# EAGLE board connector_board (EAGLE 9.5.2)
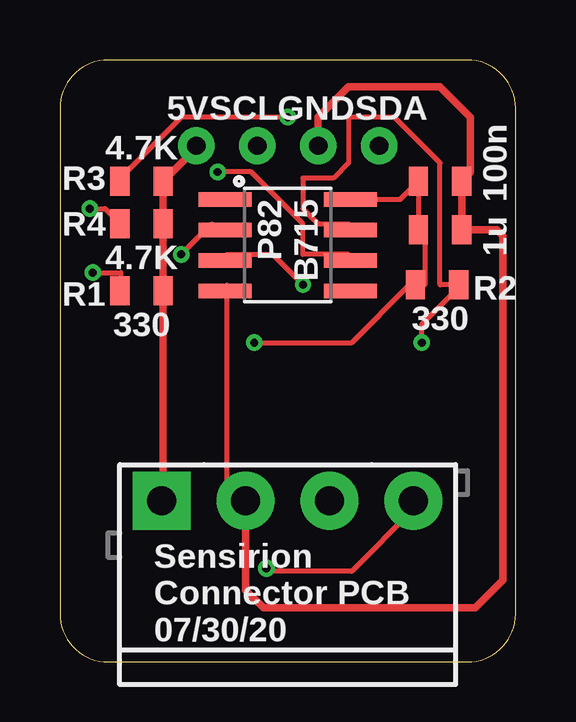
[diagram p0: board, top side]
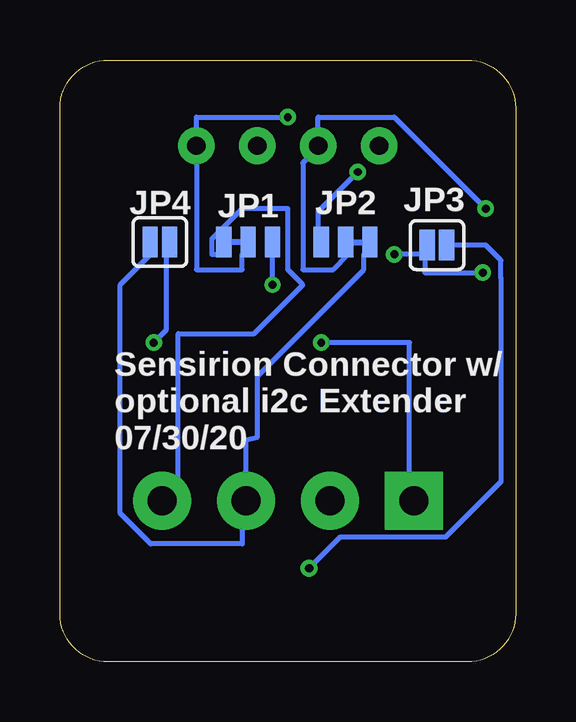
[diagram p1: board, bottom side, seen from below]

Size 19 x 25.08 mm. Coordinates in mm from the lower left corner, seen from the top.
Outline: 17,0 arc90 19,2 19,23.08 arc90 17,25.08 2,25.08 arc90 0,23.08 0,2 arc90 2,0 17,0
Copper layers (1*16): Top 0.0356mm / dielectric 1.5011mm / Bottom 0.0356mm
Design rules "LaenPCBOrder *": minimum track width 8mil, minimum drill 13mil, track to track 8mil, track to pad 8mil, pad to pad 8mil, via to via 8mil, smd to smd 6mil, copper to edge 15mil, drill to drill 6mil, minimum pad ring 7mil, minimum via ring 7mil, stop-mask expansion 3mil, vias tented up to drill 25mil, thermal gap 10mil

## Footprints (pad centres in the part's own frame; a part is rotated, then mirrored left to right if it is on the bottom)
0805 = smd 0.8 x 1.2: 1 -0.9,0; 2 0.9,0
1X04_30MILL_DIA = drill 0.762 pad 1.524: 1 0,0; 2 2.54,0; 3 5.08,0; 4 7.62,0
1X04_3.5MM_RA = drill 1.2 pad 2.413 square: 1 -0.228,0.023 | drill 1.2 pad 2.413: 2 3.272,0.023; 3 6.772,0.023; 4 10.272,0.023
SMT-JUMPER_3_1-NC_TRACE_NO-SILK = smd 0.635 x 1.27: 1 -1.016,0; 2 0,0; 3 1.016,0
SMT-JUMPER_2_NO_SILK = smd 0.635 x 1.27: 1 -0.406,0; 2 0.406,0
SOIC8 = smd 0.61 x 2.21: 1 -1.905,-2.616; 2 -0.635,-2.616; 3 0.635,-2.616; 4 1.905,-2.616; 5 1.905,2.616; 6 0.635,2.616; 7 -0.635,2.616; 8 -1.905,2.616

## Placement (x,y rotation side)
C1  1u  [0805]  15.85,18 0 top
C12  100n  [0805]  15.85,20.03 0 top
J2  [1X04_30MILL_DIA]  5.69,21.51 0 top
J7  [1X04_3.5MM_RA]  4.47,6.7 0 top
JP1  JUMPER-SMT_3_1-NC_TRACE_NO-SILK  [SMT-JUMPER_3_1-NC_TRACE_NO-SILK]  11.15,17.49 180 bottom
JP2  JUMPER-SMT_3_1-NC_TRACE_NO-SILK  [SMT-JUMPER_3_1-NC_TRACE_NO-SILK]  7.09,17.49 0 bottom
JP3  JUMPER-SMT_2_NO_SILK  [SMT-JUMPER_2_NO_SILK]  3.28,17.37 180 bottom
JP4  JUMPER-SMT_2_NO_SILK  [SMT-JUMPER_2_NO_SILK]  14.83,17.49 0 bottom
R1  330  [0805]  3.4,15.46 0 top
R2  330  [0805]  15.72,15.72 180 top
R3  4.7K  [0805]  3.4,20.03 0 top
R4  4.7K  [0805]  3.4,18.25 0 top
U$2  P82B715  [SOIC8]  9.5,17.37 270 top

## Library data of the parts
C1 C12 = SparkFun-Capacitors
J2 J7 U$2 = th_libraries
JP1-JP4 = SparkFun-Jumpers
R1-R4 = SparkFun-Resistors; PROD_ID: RES-11622

## Nets
5V: C1.1 C12.1 J2.1 J7.1 R1.2 R2.2 R3.2 R4.2 U$2.8
GND: C1.2 C12.2 J2.3 J7.2 U$2.4
LX: JP3.2 R1.1 U$2.2
LY: JP4.2 R2.1 U$2.7
SCL0: J2.2 JP2.2 R4.1
SCL1: J7.3 JP2.3 JP4.1
SDA0: J2.4 JP1.2 R3.1
SDA1: J7.4 JP1.3 JP3.1
SX: JP1.1 U$2.3
SY: JP2.1 U$2.6

## Tracks (layer width: path | path; a pad name or v marks a point on that pad's centre or on a via)
5V  (via drill 0.33)
  Top 0.203: U$2.8 14.19,19.27 C12.1 C1.1 15.21,17.62 15.21,15.72 R2.2 14.58,15.72 12.17,13.3 v8.1,13.3
  Top 0.305: J2.1 5.69,21.42 R3.2 R4.2 R1.2 4.3,6.78 J7.1
  Bottom 0.203: v8.1,13.3 4.42,13.3 4.42,6.83 J7.1
GND
  Top 0.203: U$2.4 6.96,15.72 6.96,6.83 7.59,6.83 J7.2
  Top 0.305: J2.3 10.77,22.7 12.04,23.97 15.85,23.97 17.12,22.7 17.12,20.4 C12.2 C1.2 18.21,18 18.47,17.75 18.47,3.4 17.32,2.25 8.48,2.25 7.74,2.99 J7.2
LX  (via drill 0.33)
  Top 0.203: v1.37,16.22 2.54,16.22 R1.1 | v5.06,16.99 6.32,18.25 U$2.2
  Bottom 0.203: v1.37,16.22 3.78,16.22 3.78,16.99 | 3.78,16.99 v5.06,16.99 | 3.78,16.99 JP3.2
LY  (via drill 0.33)
  Top 0.203: v15.09,13.3 15.09,14.06 16.61,15.59 16.61,15.7 R2.1 15.85,15.72 15.85,20.8 13.94,22.7 12.04,22.7 12.04,20.8 11.4,20.16 10.13,20.16 10.13,18.89 10.77,18.25 12.04,18.25 U$2.7
  Bottom 0.203: v15.09,13.3 14.58,13.81 14.58,16.99 JP4.2
SCL0  (via drill 0.33)
  Top 0.203: v1.25,18.89 1.88,18.89 2.51,18.25 R4.1
  Bottom 0.203: v1.25,18.89 5.06,22.7 8.23,22.7 J2.2 8.23,21.43 8.87,20.8 8.87,16.35 7.59,16.35 6.96,16.99 JP2.2
SCL1
  Bottom 0.203: JP4.1 15.21,16.99 16.49,15.72 16.49,6.19 15.21,4.92 11.4,4.92 11.4,6.19 J7.3 11.24,9.26 10.77,9.37 10.77,11.91 6.32,16.35 6.32,16.99 JP2.3
SDA0  (via drill 0.33)
  Top 0.203: v9.5,22.7 5.06,22.7 2.51,20.16 R3.1
  Bottom 0.203: v9.5,22.7 13.31,22.7 J2.4 13.31,16.35 11.4,16.35 11.4,16.99 JP1.2
SDA1  (via drill 0.35)
  Top 0.203: J7.4 14.74,6.35 12.17,3.78 8.74,3.78 v8.61,3.9
  Bottom 0.203: JP1.3 12.04,16.99 12.68,16.99 12.68,17.62 11.4,18.89 9.5,18.89 9.5,16.35 8.87,15.72 10.9,13.68 14.07,13.68 14.07,7.15 J7.4 | v8.61,3.9 7.31,5.21 2.91,5.21 0.6,7.52 0.6,15.98 0.61,16 0.61,16.73 1.25,17.37 JP3.1
SX  (via drill 0.33)
  Top 0.203: v10.13,15.72 8.87,16.99 6.96,16.99 U$2.3
  Bottom 0.203: v10.13,15.72 JP1.1
SY  (via drill 0.33)
  Top 0.203: v6.58,20.41 7.98,20.41 10.13,18.25 10.13,16.99 12.04,16.99 U$2.6
  Bottom 0.203: v6.58,20.41 8.23,18.76 8.23,17.62 JP2.1

## Text on the board
tPlace: 5V | SCL | GND | SDA | P82 / B715 | Sensirion / Connector PCB / 07/30/20
bPlace: Sensirion Connector w/ / optional i2c Extender / 07/30/20